# Altium PCB XKT3619_wireless_charging_driver_T.PcbDoc
Units mil, origin at the board's own origin, x right, y up, seen from the top; angles counter-clockwise.
Board outline 866.14 x 511.81 mil, 2 copper layers (Top Layer, Bottom Layer); 9 components, 7 nets, 34 pads, 4 vias.
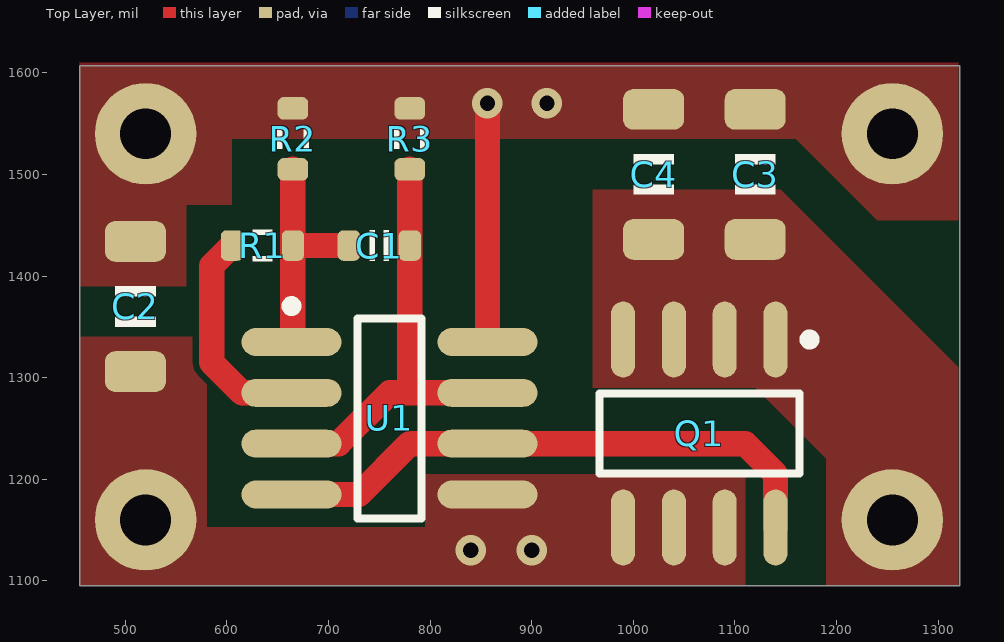
[diagram p0: Top Layer view]
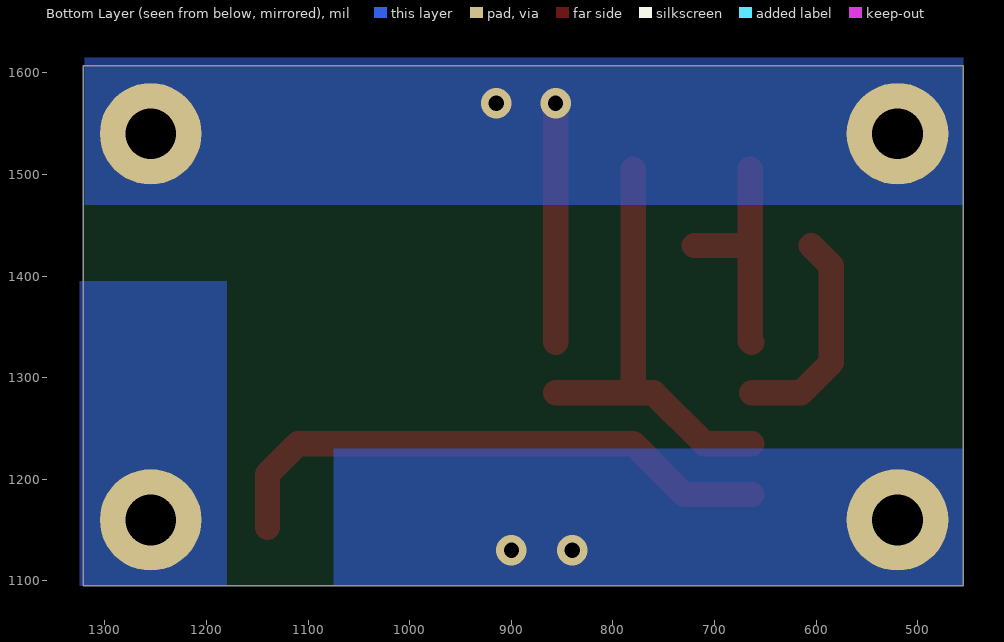
[diagram p1: Bottom Layer view, seen from below]
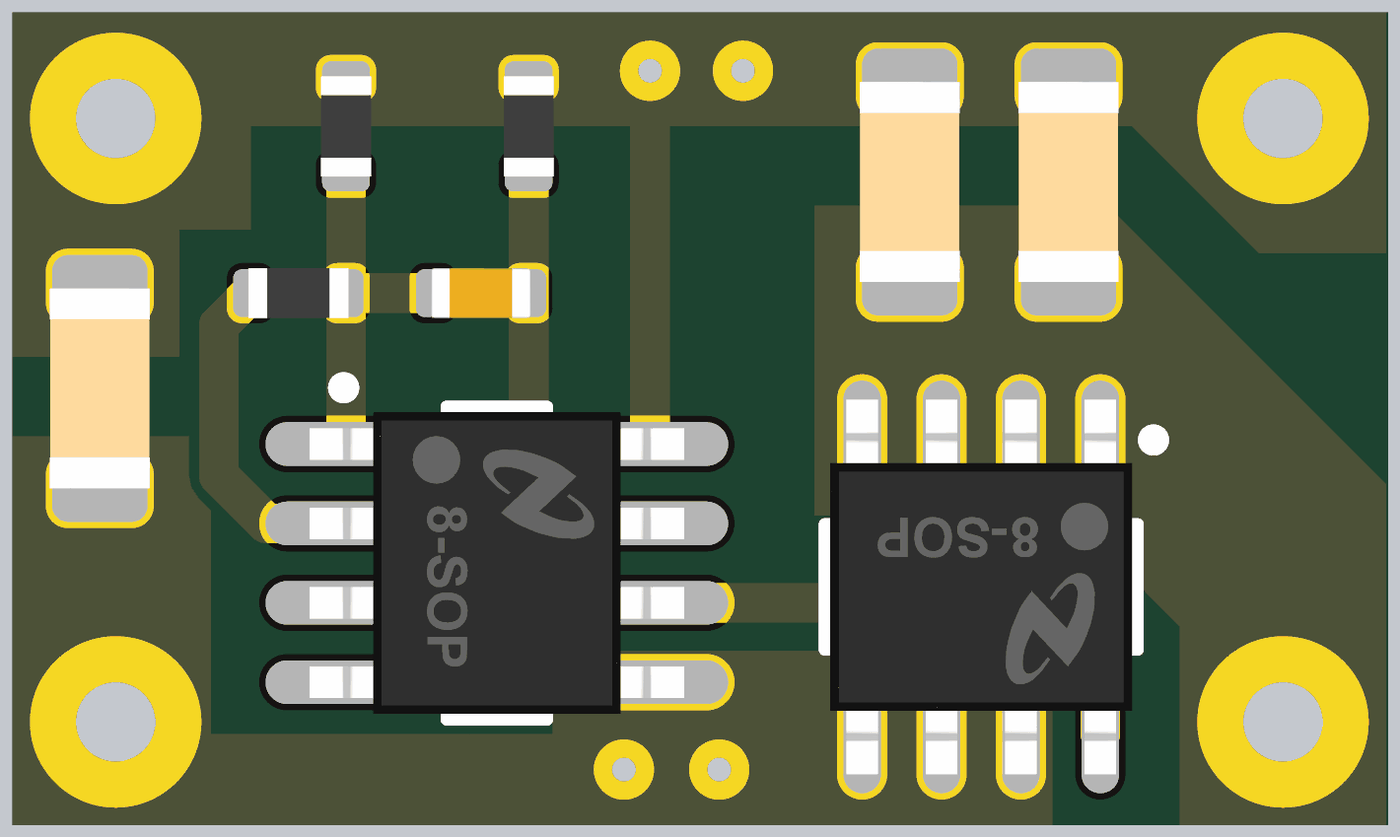
[diagram p2: 3D render of the assembled board from above, using the file's embedded part models]

## Layer stack, top to bottom
Top Solder: solder mask 0.4, Solder Resist, Dk 3.5
Top Layer: signal copper 1.4
Dielectric 1: dielectric 12.6, FR-4, Dk 4.8
Bottom Layer: signal copper 1.4
Bottom Solder: solder mask 0.4, Solder Resist, Dk 3.5

## Board outline
455,1095 455,1606.81 1321.14,1606.81 1321.14,1095

## Design rules (kind name [scope] priority, off if disabled: settings)
Clearance [All] p1: gap=6 ignorepadtopadclearanceinfootprint=FALSE
PolygonConnect [All] p1: connectstyle=Direct reliefconductorwidth=10 reliefentries=4 polygonreliefangle="90 Angle" airgapwidth=10
RoutingVias [All] p1: holewidth=12 width=24 viastyle="Through Hole" minholewidth=10 minwidth=22 maxholewidth=256 maxwidth=300
SolderMaskExpansion [All] p1: expansion=4
Width [All] p1: maxlimit=10000 minlimit=6 preferedwidth=10 minimp=50.000000 maximp=50.000000 favimp=50.000000
30 further rules are at their usual default settings.

## Components (designator, comment, footprint, x,y, rotation, side; value= is the part's Value field where it differs from the comment)
C1 "Cap" CAP_0603 750,1430 r0 top value=120pF
C2 "Cap" CAP_1206 510,1370 r270 top value=47uF
C3 "Cap" CAP_1206 1120,1500 r270 top value=393
C4 "Cap" CAP_1206 1020,1500 r270 top value=393
Q1 "XKT-33?" SOP8_L 1065,1245 r270 top
R1 "Res" RES_0603 635,1430 r180 top value=752
R2 "Res" RES_0603 665,1535 r270 top value=472
R3 "Res" RES_0603 780,1535 r270 top value=473
U1 "XKT-412" SOP8_M 760,1260 r0 top

## Footprints (in the part's own frame and the unit in brackets; to place one, negate y for a bottom-side part, rotate by r counter-clockwise, add the part's x,y. Pads: shape width x height; smd on the part's side, far side on the other; paste and mask are expansions set on the pad)
CAP_0603 [mil]
  rrect50% 22x30 smd: 1(-30,0) 2(30,0)
  silkscreen extent -10,-15 10,15, body extent -31,-16 31,16, height 31
CAP_1206 [mil]
  rrect50% 40x60 smd: 1(-64,0) 2(64,0)
  silkscreen extent -20,-20 20,20, body extent -65,-31 65,31, height 49
RES_0603 [mil]
  rrect50% 22x30 smd: 1(-30,0) 2(30,0)
  silkscreen extent -10,-16 10,16, body extent -31,-16 31,16, height 18
SOP8_L [mm]
  oval 1.9x0.6 smd: 1(-2.35,1.905) 2(-2.35,0.635) 3(-2.35,-0.635) 4(-2.35,-1.905) 5(2.35,-1.905) 6(2.35,-0.635) 7(2.35,0.635) 8(2.35,1.905)
  silkscreen extent -2.47,-2.5 1,2.88, body extent -3,-2.41 3,2.41, height 1.7
SOP8_M [mm]
  oval 2.5x0.7 smd: 1(-2.45,1.905) 2(-2.45,0.635) 3(-2.45,-0.635) 4(-2.45,-1.905) 5(2.45,-1.905) 6(2.45,-0.635) 7(2.45,0.635) 8(2.45,1.905)
  silkscreen extent -2.57,-2.5 0.8,2.93, body extent -3,-2.41 3,2.41, height 1.7

## Part data
Q1: library part XKT-333/335, "XKT-333 335 是芯科泰最新开发的廉价优质 高频大功率输出集成电路，配合 XKT-412 芯 片工作体积小输出功率 强大，可工作较高的工作频率下在较高频率 范围内使用可大大减少发送线圈的体积和尺 寸增强发射功率，降低线圈成本，由于对线 圈电感量要求小也可直接采用 PCB 作为发射 使生产应用更加简便；芯片采用最先进的宽 电压自适应技术芯片设计工艺，同样的发射 电路可以在任意工作范围内电压使用而不改 变任何器件使用极为方便，电路极为简单， 具有精度高稳定性好等特点，其专门用于无 线感应智能充电、供电管理系统中，可靠性 能高。XKT-412 负责处理该系统中的无线电 能传输功能，采用电磁能量转换原理并配合 接收部分做Ä"
U1: "XKT-412 是芯科泰最新开发的高频大功率 集成电路，体积小输出功率强大，可工作 在较高频率范围内使用可大大减少发送线 圈的体积和尺寸增强发射功率，降低线圈 成本，由于对线圈电感量要求小也可直接 采用 PCB 作为发射使生产应用更加简便； 芯片采用最先进的宽电压自适应技术芯片 设计工艺，同样的发射电路可以在任意工 作范围内电压使用而不改变任何器件使用 极为方便，电路极为简单，具有精度高稳 定性好等特点，其专门用于无线感应智能 充电、供电管理系统中，可靠性能高。XK T-412 负责处理该系统中的无线电能传输功 能，采用电磁能量转换原理并配合接收部分 做能量转换及电路的实时¼"

## Free pads (board coordinates)
  round 100 hole 50: C(520,1160) C(520,1540) C(1255,1160) C(1255,1540)

## Via types
v1: diameter 30, hole 15, Top Layer to Bottom Layer, 4 vias

## Nets (pads, with @x,y where several pads share a name; then routed paths per layer and width w, separated by ;. In a path a pad name is that pad's centre, name@x,y a point inside that pad or via, vN(x,y) a via of type N, cw(c..) or ccw(c..) an arc to the next point about the centre after c; other vN are vias at no path point)
GND: C2.2 pad.C@520,1160 Q1.5 Q1.6 Q1.7 U1.5
  other v1: 840,1130 900,1130
IN: C2.1 C3.1 C4.1 pad.C@520,1540 pad.C@1255,1540 R2.1 R3.1 U1.8 | length 235
  Top Layer w25: U1.8 v1(856.46,1570)
  other v1: 915,1570
NetC1_1: C1.1 R1.1 R2.2 U1.1 | length 225.6
  Top Layer w25: U1.1 665,1336.46 R1.1 ; R2.2 R1.1 ; C1.1 R1.1
NetC1_2: C1.2 R3.2 U1.3 U1.7 | length 433.6
  Top Layer w25: U1.3 710,1235 760,1285 780,1285 ; R3.2 C1.2 780,1285 ; U1.7 780,1285
NetQ1_8: Q1.8 U1.4 U1.6 | length 562.1
  Top Layer w25: U1.4 730,1185 780,1235 U1.6 1110,1235 1140,1205 Q1.8
NetR1_2: R1.2 U1.2 | length 214.3
  Top Layer w25: R1.2 585,1410 585,1315 615,1285 U1.2
OUT: C3.2 C4.2 pad.C@1255,1160 Q1.1 Q1.2 Q1.3 Q1.4

## Polygon pours and split planes (outlines as drawn)
IN on Top Layer "IN_L01_P004" (solid, pour order 4): 455,1390 560,1390 560,1470 605,1470 605,1535 1160,1535 1240,1455 1320,1455 1320,1610 455,1610
OUT on Top Layer "OUT_L01_P002" (solid, pour order 2): 960,1485 1145,1485 1320,1310 1320,1095 1190,1095 1190,1220 1120,1290 960,1290
GND on Top Layer "GND_L01_P000" (solid, pour order 0): 455,1340 580,1340 580,1152.48 795,1152.48 795,1205 1110,1205 1110,1095 455,1095
OUT on Bottom Layer "OUT_L02_P012" (solid, pour order 12): 1180,1095 1325,1095 1325,1395 1180,1395
GND on Bottom Layer "GND_L02_P008" (solid, pour order 8): 455,1095 455,1230 1075,1230 1075,1095
IN on Bottom Layer "IN_L02_P006" (solid, pour order 6): 455,1615 1320,1615 1320,1470 455,1470

## Silkscreen, mask and mechanical layers (free items; w line width, h text height)
Mechanical 1:
  the board outline again, w10